# Altium PCB Solar_Charger3.PcbDoc
Units mm, origin at the board's own origin, x right, y up, seen from the top; angles counter-clockwise.
Board outline 79.76 x 43.81 mm, 2 copper layers (Top Layer, Bottom Layer); 24 components, 17 nets, 57 pads, 11 vias.
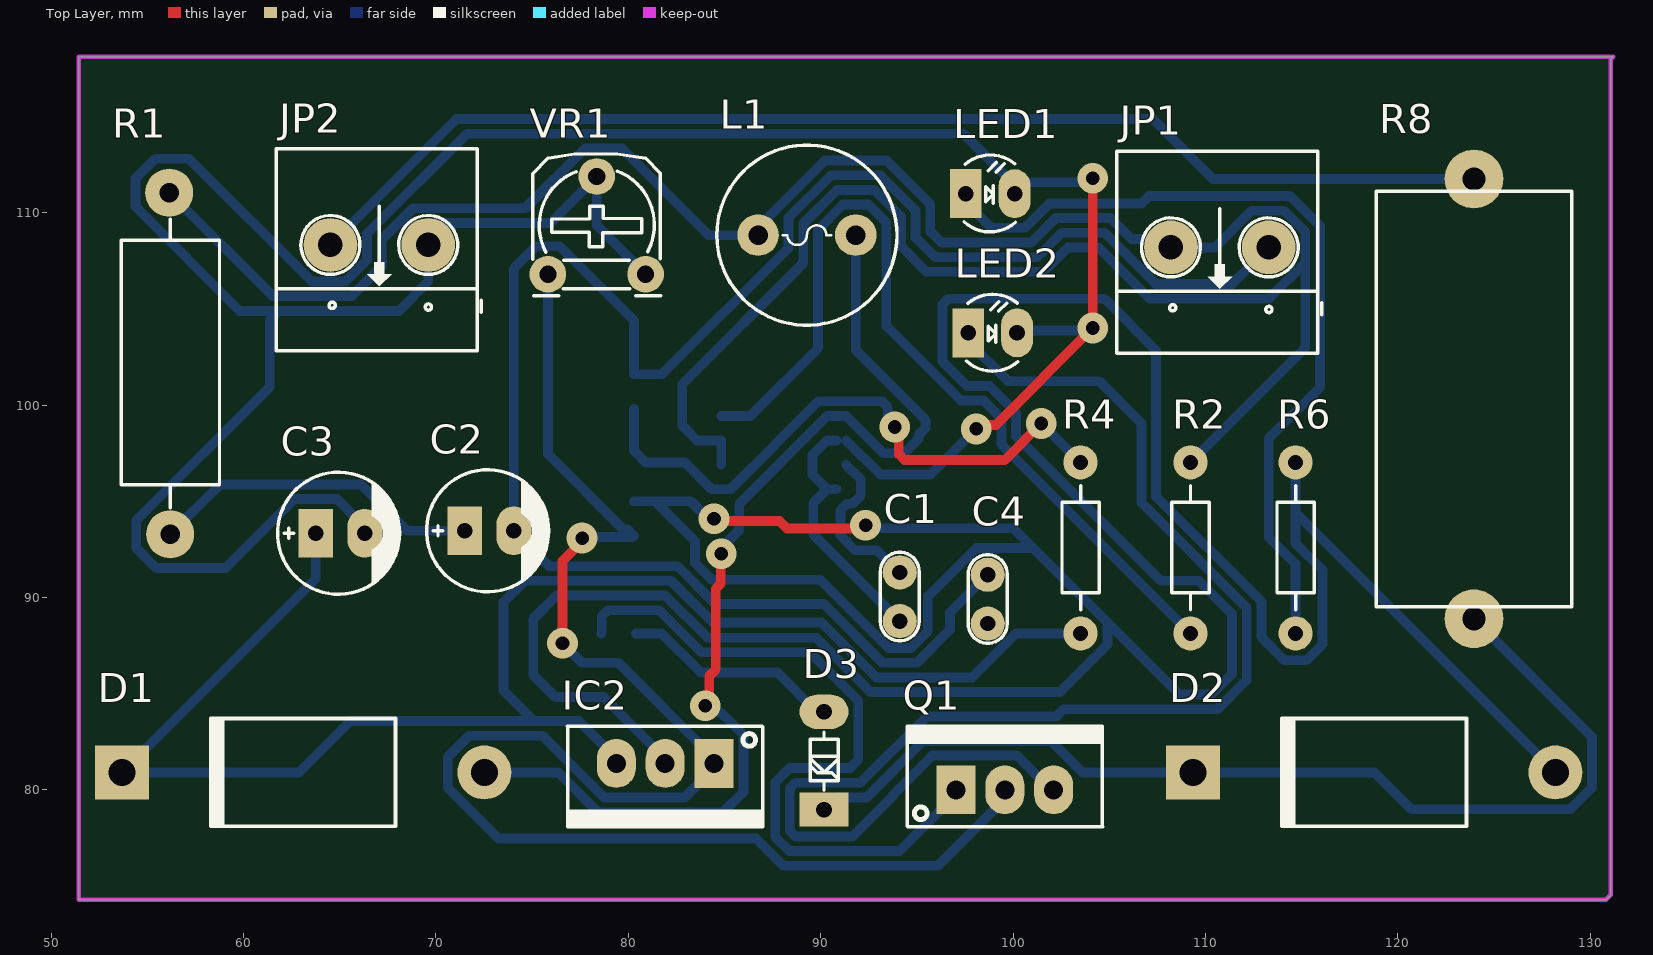
[diagram p0: Top Layer view]
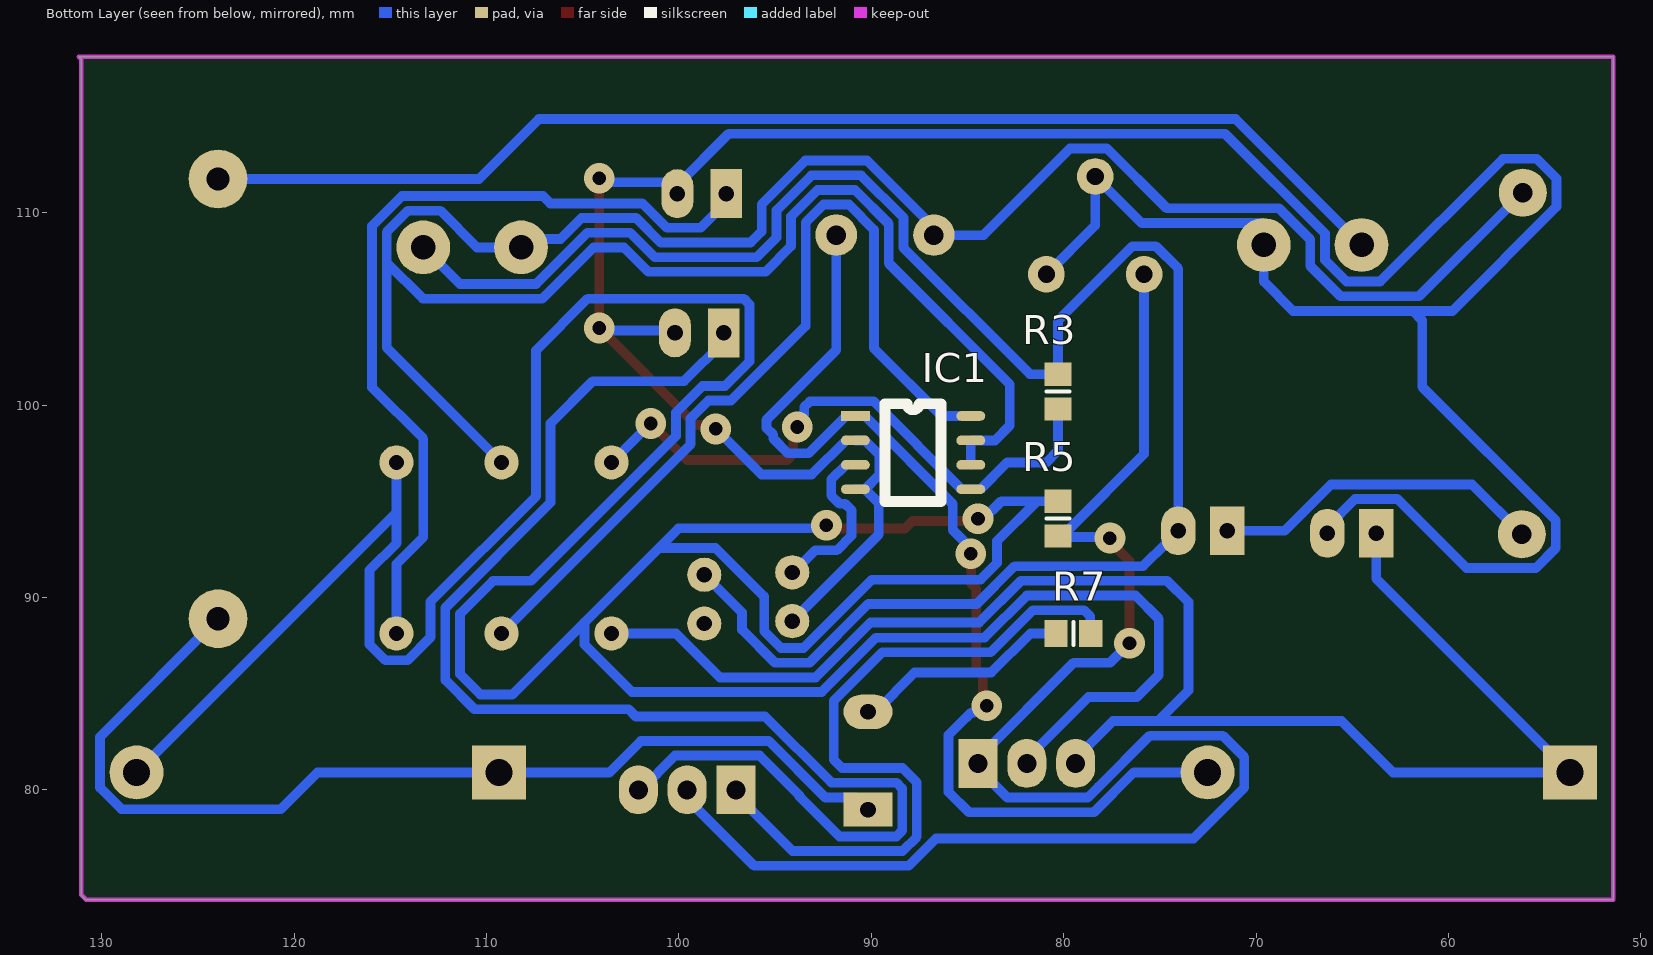
[diagram p1: Bottom Layer view, seen from below]
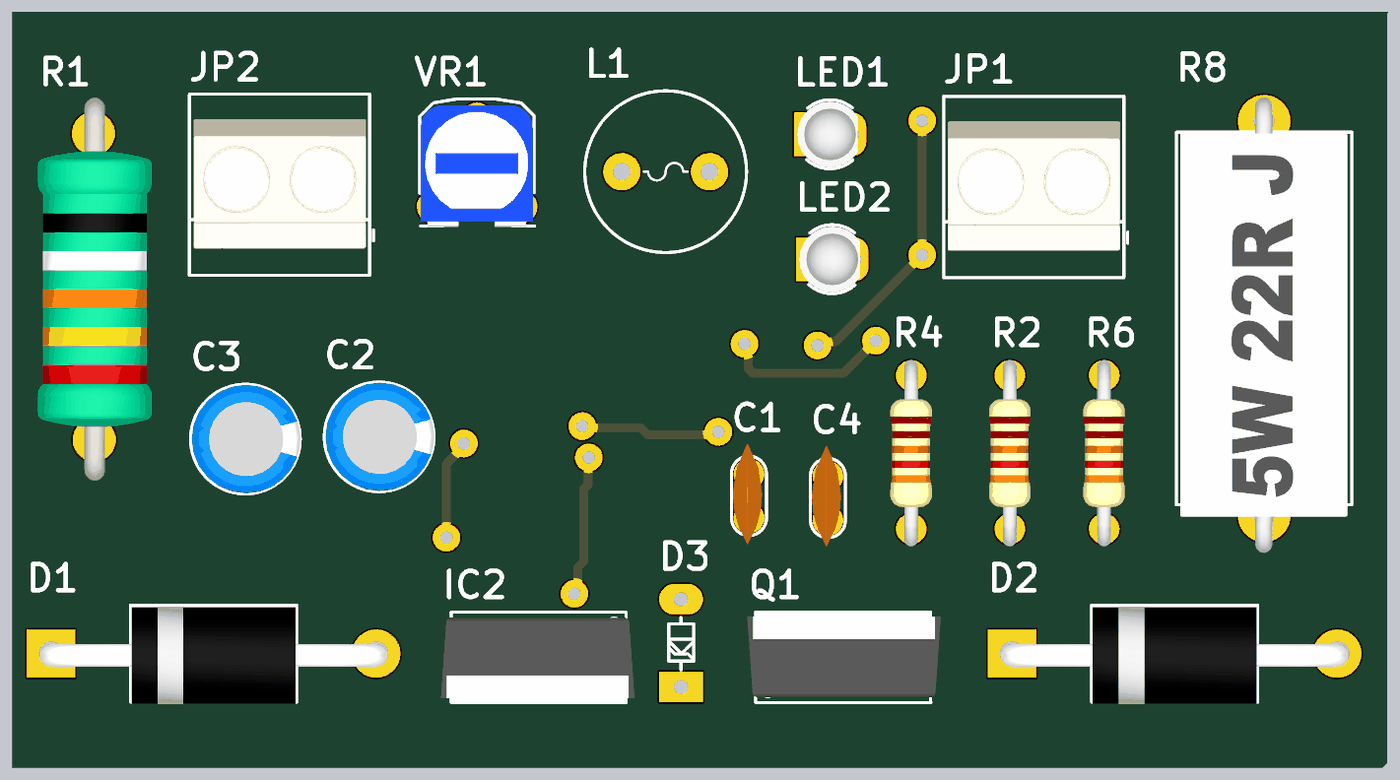
[diagram p2: 3D render of the assembled board from above, using the file's embedded part models]
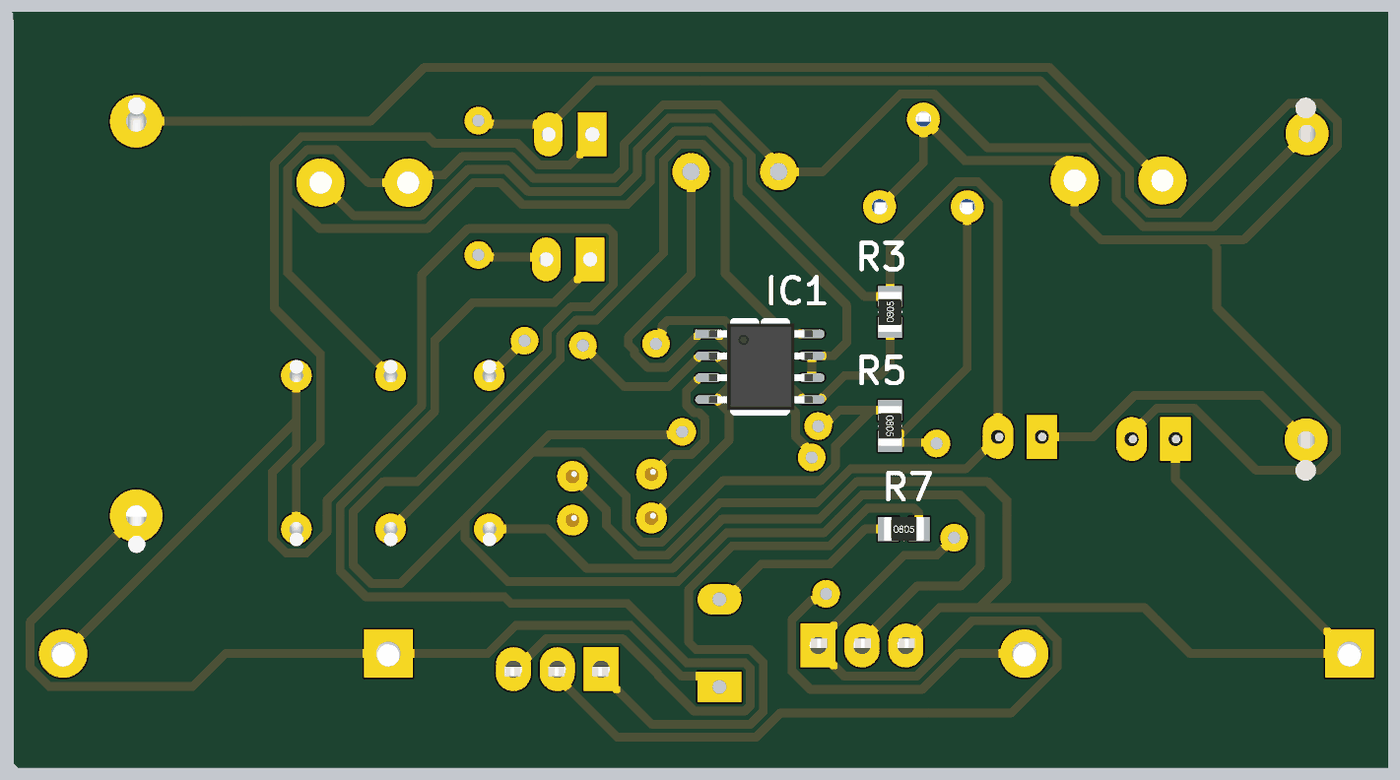
[diagram p3: 3D render of the assembled board from below, using the file's embedded part models]

## Layer stack, top to bottom
Top Solder: solder mask 0.0102, Solder Resist, Dk 3.5
Top Layer: signal copper 0.0356
Dielectric 1: dielectric 0.32, FR-4, Dk 4.8
Bottom Layer: signal copper 0.0356
Bottom Solder: solder mask 0.0102, Solder Resist, Dk 3.5

## Board outline
51.435,74.295 51.435,118.11 131.191,118.11 131.064,117.983 131.064,74.549 130.81,74.295

## Design rules (kind name [scope] priority, off if disabled: settings)
Clearance [All] p1: gap=0.254 ignorepadtopadclearanceinfootprint=FALSE except(0: Arc-Hole Track-Hole SMDPad-Hole THPad-Hole Via-Hole Fill-Hole Poly-Hole Region-Hole Text-Hole)
MinimumSolderMaskSliver [All] p1: minsoldermaskwidth=0
PolygonConnect [All] p1: connectstyle=Relief reliefconductorwidth=0.254 reliefentries=4 polygonreliefangle="90 Angle" airgapwidth=0.254
RoutingVias [All] p1: holewidth=0.711 width=1.27 viastyle="Through Hole" minholewidth=0.711 minwidth=1.27 maxholewidth=0.711 maxwidth=2
SilkToSolderMaskClearance [IsPad] p1: minsilkscreentomaskgap=0 clearancetoexposedcopper=TRUE
SolderMaskExpansion [All] p1: expansion=0.102 istentingtop=FALSE
Width [All] p1: maxlimit=0.762 minlimit=0.254 preferedwidth=0.508 minimp=50.000000 maximp=50.000000 favimp=50.000000
28 further rules are at their usual default settings.

## Components (designator, comment, footprint, x,y, rotation, side; value= is the part's Value field where it differs from the comment)
C1 "270pF" CN1 94.107,88.773 r90 top value=100pF
C2 "100uF" CP1/2.5 71.501,93.472 r0 top value="47uF/16 - 50V"
C3 "100uF" CP1/2.5 63.754,93.345 r0 top value="47uF/16 - 50V"
C4 "100 nF" CN1 98.679,88.646 r90 top value=100pF
D1 "1N5819" DO-201 72.517,80.912 r180 top
D2 "1N4007" DO-201 128.187,80.912 r180 top
D3 "6V/0.5W" DZ0.5A 90.17,84.061 r90 top value=3v3
IC1 "MC34063" SOP8 90.825,99.441 r180 bottom
IC2 "LM317" QTO-220 84.455,81.382 r180 top
JP1 "Header 2_1" HED2 113.284,108.204 r180 top value="Header 2"
JP2 "Header 2_1" HED2 69.596,108.331 r180 top value="Header 2"
L1 "330mH" L01 89.281,108.839 r0 top value="150 mH"
LED1 "LED" LED-3 97.536,110.998 r0 top value="LED 3 ly Single Colour"
LED2 "LED" LED-3 97.663,103.759 r0 top value="LED 3 ly Single Colour"
Q1 "BD139" QTO-220 97.028,80.01 r0 top
R1 "0.3 Ohm/2W" R2W 56.185,93.294 r90 top value="R2W - 47"
R2 "180 Ohm" R1/4W 109.22,88.138 r90 top value="R1/4W - 1K"
R3 "1k" 0805_Res 80.291,100.711 r90 bottom value="R1/4W - 1K"
R4 "4k" R1/4W 103.505,88.138 r90 top value="R1/4W - 1K"
R5 "1k" 0805_Res 80.291,94.107 r270 bottom value="R1/4W - 1K"
R6 "4k" R1/4W 114.681,88.138 r90 top value="R1/4W - 1K"
R7 "1k" 0805_Res 79.491,88.138 r180 bottom value="R1/4W - 1K"
R8 "R6W - 1k" R5W 123.952,88.9 r90 top value="R5W - 0,47R"
VR1 "1K" VR 75.819,106.807 r0 top value="VR 10K"

## Footprints (in the part's own frame and the unit in brackets; to place one, negate y for a bottom-side part, rotate by r counter-clockwise, add the part's x,y. Pads: shape width x height; smd on the part's side, far side on the other; paste and mask are expansions set on the pad)
0805_Res [mm] "Chip Resistor, Body 2.0x1.2mm, IPC Medium Density"
  rect 1.2x1.4 smd: 1(-0.9,0) 2(0.9,0)
  silkscreen extent 0,-0.6 0,0.6, body extent -1.15,-0.67 1.15,0.67, height 0.76
CN1 [mil]
  round 70 hole 31: 1(0,0) 2(100,0)
  silkscreen extent -40,-40 141,40, body extent -60,-30 170,37, height 265
CP1/2.5 [mil] "Tu hoa 33 >100 uF,50V, 220uF/16V,25V"
  rect 70x100 hole 32: 1(0,0)
  oval 70x100 hole 32: 2(100,0)
  silkscreen extent -78,-125 172,125, body extent -76,-124 172,124, height 422
DO-201 [mm] "Diode, Axial; Body 9.5 x 5.6 mm (LxDia. max), Lead Dia. 1.32 mm (max)"
  round 2.8 hole 1.4: 1(0,0)
  rect 2.8x2.8 hole 1.4: 2(18.84,0)
  silkscreen extent 4.62,-2.8 14.32,2.8, body extent -0.65,-2.72 19.49,2.92, height 5.82
DZ0.5A [mil] "Diode Zenner, W 80mil, L 300mil"
  oval 70x100 hole 32: 1(0,0)
  rect 70x100 hole 32: 2(-200,0)
  silkscreen extent -161,-29 -42,28
HED2 [mil] "Header 2, 2 pin, hight 300mil, Pin to Pin 200, Colour Green"
  round 110 hole 50: 1(0,0) 2(200,0)
  silkscreen extent -109,-197 311,217, body extent -92,-140 302,155, height 394
L01 [mil] "Inductor"
  round 85 hole 40: 1(-100,0) 2(100,0)
  silkscreen extent -184,-184 184,184
LED-3 [mil] "LED 2 PIN, 3ly Only colour"
  rect 65x100 hole 32: 1(0,0)
  oval 65x100 hole 32: 2(100,0)
  silkscreen extent -4,-78 102,79, body extent -25,-75 113,75, height 217
QTO-220 [mil] "TO-220 - 1-2-3"
  rect 80x100 hole 39: 1(0,0)
  oval 80x100 hole 39: 2(100,0) 3(200,0)
  silkscreen extent -100,-76 300,130, body extent -119,-64 322,121, height 755
R1/4W [mil] "R 1/4W, 2 Pin, 350mil"
  round 70 hole 31: 1(0,0) 2(350,0)
  silkscreen extent 48,-38 302,38, body extent -40,-47 386,47, height 111
R2W [mm] "R2W, 2 pin, 700mil"
  round 2.5 hole 1: 1(0,0) 2(17.755,0.051)
  silkscreen extent 1.37,-2.57 16.38,2.54, body extent -2.36,-3.33 19.84,3.27, height 8.3
R5W [mil] "R5W , 2 pin, 400 x 950mil"
  round 120 hole 47.24: 1(0,0) 2(900,0)
  silkscreen extent 25,-200 875,200, body extent -85,-190 955,192, height 363
SOP8 [mm]
  rect 1.5x0.5 smd: 1(0,0)
  oval 1.5x0.5 smd: 2(0,-1.27) 3(0,-2.54) 4(0,-3.81) 5(6,-3.81) 6(6,-2.54) 7(6,-1.27) 8(6,0)
  silkscreen extent 1.54,-4.45 4.46,0.63, body extent 0.03,-4.41 6.07,0.61, height 1.6
VR [mil] "Resistor Variable"
  round 75 hole 35: 1(0,0) 2(100,200) 3(200,0)
  silkscreen extent -31,-44 231,246, body extent -29,-46 227,232, height 295

## Part data
C1 C4: library part CN1, "Cap np  1pF - 472pF"
C2 C3: library part CP2, "C 47uF/50V , 220uF/16V", Description 1="470uF/6,3V - 330uF/10V - 220uF/16V", Description 2="100uF/25V - 35V - 47uF/50V - 22uF/100V", Description 3="33uF => 47uF/63V - 1uF => 4,7uF/160V", Description 4="1uF => 2,2uF/250V - 1uF/350V"
D3: library part DZ, "Diode Zenner"
IC1: library part SO8
IC2: "Adj Voltage +1.2 -> +37V"
JP1 JP2: "Header, 2-Pin", Manufacturer="Generic Components", Class=Connector
L1: library part L1, "Inductor"
LED1 LED2: "LED Single colour Green and Red"
R1: library part R2W, "Resistor 2W"
R2 R4 R6: library part R1/4W, "Resistor 1/4W"
R3 R5 R7: library part R, "Resistor 1/4W"
R8: library part R5W, "Resistor 5W"
VR1: library part VR1, "Var Resistor"

## Via types
v1: diameter 1.6, hole 0.711, Top Layer to Bottom Layer, 11 vias

## Nets (pads, with @x,y where several pads share a name; then routed paths per layer and width w, separated by ;. In a path a pad name is that pad's centre, name@x,y a point inside that pad or via, vN(x,y) a via of type N, cw(c..) or ccw(c..) an arc to the next point about the centre after c; other vN are vias at no path point)
GND: C1.1 C3.2 IC1.2 IC1.4 JP2.1 LED1.2 LED2.2 VR1.2 VR1.3 | length 170.4
  Top Layer w0.508: v1(98.081,98.769) 98.29,98.978 99.105,98.978 103.95,103.823 104.14,103.823 v1(104.14,111.798)
  Bottom Layer w0.508: C3.2 66.294,93.682 64.853,95.123 62.655,95.123 59.068,91.536 55.457,91.536 54.427,92.566 54.427,94.022 61.363,100.958 61.363,104.416 61.849,104.902 ; JP2.1@68.472,108.285 69.661,109.474 73.533,109.474 75.946,109.474 VR1.2 78.359,109.347 VR1.3 ; JP2.1 69.596,106.426 68.072,104.902 61.849,104.902 ; IC1.4@90.337,95.631 IC1.4 ; IC1.2 90.333,98.171 89.567,97.405 89.567,96.397 90.333,95.631 89.61,94.909 89.61,93.27 C1.1 ; IC1.2@91.321,98.167 93.095,96.393 95.705,96.393 v1(98.081,98.769) ; LED2.2@99.706,104.256 LED2.2 100.33,103.886 104.013,103.886 v1(104.14,104.013) ; v1(104.14,111.798) 103.931,111.589 100.604,111.589 100.076,111.061 LED1.2 100.076,111.442 97.409,114.109 71.603,114.109 66.421,108.928 66.421,107.542 65.305,106.426 63.546,106.426 57.165,112.807 55.406,112.807 54.376,111.777 54.376,110.32 59.794,104.902 61.849,104.902
NetC1_2: C1.2 IC1.3 | length 8.5
  Bottom Layer w0.508: IC1.3@91.321,96.897 92.083,96.135 92.083,95.317 91.639,94.873 91.352,94.873 91.024,94.545 91.024,93.222 91.791,92.456 92.915,92.456 94.058,91.313 C1.2
NetC2_1: C2.1 R1.1 | length 17.4
  Bottom Layer w0.508: R1.1 58.776,95.885 66.111,95.885 68.524,93.472 C2.1
NetC2_2: C2.2 C4.2 JP1.1 R3.2 | length 97.9
  Bottom Layer w0.508: C4.2 96.719,89.226 96.719,88.331 95.001,86.614 93.207,86.614 90.159,89.662 84.517,89.662 82.547,91.632 75.881,91.632 74.665,92.848 74.628,92.848 74.041,93.435 C2.2 74.041,107.094 75.214,108.267 76.424,108.267 80.291,104.4 R3.2 81.758,101.611 88.328,108.181 88.328,109.747 90.532,111.95 93.11,111.95 94.932,110.128 94.932,108.714 95.95,107.696 101.26,107.696 102.53,108.966 104.748,108.966 107.415,106.299 111.379,106.299 JP1.1
NetC3_1: C3.1 D1.2 IC2.3 R4.1 | length 84.8
  Bottom Layer w0.508: C3.1 63.754,90.989 D1.2 62.888,80.912 65.558,83.582 77.429,83.582 79.375,81.636 IC2.3 ; 75.107,83.582 73.512,85.176 73.512,89.768 74.614,90.87 82.231,90.87 84.391,88.71 90.034,88.71 92.891,85.852 97.861,85.852 100.147,88.138 R4.1
NetD1_1: D1.1 IC1.1 L1.2 | length 56.1
  Top Layer w0.508: v1(83.996,84.377) 84.205,84.586 84.205,85.93 84.545,86.271 84.545,90.462 84.799,90.716 84.799,92.249 v1(84.828,92.278)
  Bottom Layer w0.508: D1.1 76.358,80.912 78.428,78.842 84.919,78.842 85.979,79.901 85.979,82.862 85.392,83.449 84.827,84.015 84.653,84.015 84.291,84.377 v1(83.996,84.377) ; v1(84.828,92.278) 84.828,92.573 85.763,93.508 85.763,94.871 90.333,99.441 91.317,99.441 93.26,97.498 94.331,97.498 95.095,98.262 95.095,98.469 95.448,98.822 95.448,99.243 91.821,102.87 L1.2
NetD2_1: D2.1 IC2.2 R5.1 R6.2 | length 198.9
  Top Layer w0.508: v1(84.452,94.093) 84.565,93.98 87.863,93.98 88.251,93.592 92.16,93.592 v1(92.332,93.764)
  Bottom Layer w0.508: R5.1 81.396,95.007 ; IC2.2 81.915,81.636 80.066,83.484 78.715,84.835 76.2,84.835 75.057,85.978 75.057,88.9 76.265,90.108 81.915,90.108 84.107,87.916 89.749,87.916 92.576,85.09 102.433,85.09 104.902,87.559 104.902,88.717 ; v1(84.452,94.093) 84.156,94.093 83.242,95.007 81.396,95.007 ; v1(92.332,93.764) 92.497,93.599 100.02,93.599 101.036,92.583 ; R6.2 114.681,94.418 ; D2.1 114.681,94.418 ; 81.396,95.007 83.458,92.945 83.458,91.798 84.324,90.932 89.966,90.932 93.522,87.376 94.686,87.376 95.567,88.258 95.567,90.05 98.1,92.583 101.036,92.583 ; 101.036,92.583 104.902,88.717 ; 104.902,88.717 108.656,84.963 110.319,84.963 111.379,86.023 111.379,89.158 109.666,90.87 107.687,90.87 100.151,98.406 100.151,99.626 98.774,101.003 97.605,101.003 96.329,102.279 96.329,105.239 96.627,105.537 104.74,105.537 107.429,102.849 107.429,95.263 112.903,89.789 112.903,87.94 114.102,86.741 115.26,86.741 116.078,87.559 116.078,91.423 114.681,92.82 114.681,94.418
NetD2_2: D2.2 D3.2 R8.1 | length 54.7
  Bottom Layer w0.508: D3.2 90.805,79.616 92.392,79.616 95.326,82.55 101.977,82.55 103.616,80.912 D2.2 118.781,80.912 120.689,79.004 128.977,79.004 130.095,80.121 130.095,82.757 R8.1
NetD3_1: D3.1 R7.1 | length 11.5
  Bottom Layer w0.508: R7.1 81.73,88.138 83.768,86.1 87.751,86.1 89.789,84.061 D3.1
NetIC1_5: IC1.5 R3.1 R4.2 | length 32.1
  Top Layer w0.508: v1(93.849,98.865) 94.058,98.656 94.058,97.453 94.355,97.155 99.568,97.155 v1(101.459,99.046)
  Bottom Layer w0.508: R3.1 80.291,97.636 80.899,97.028 82.936,97.028 84.333,95.631 IC1.5 85.317,95.631 87.595,97.909 87.595,97.929 89.868,100.203 93.19,100.203 93.487,99.905 93.487,99.522 93.849,99.161 v1(93.849,98.865) ; v1(101.459,99.046) 101.473,99.046 103.491,97.028 R4.2
NetIC1_6: IC1.6 IC1.7 JP1.2 L1.1 R1.2 R2.2 | length 137
  Bottom Layer w0.508: R1.2 61.519,105.664 65.621,105.664 67.183,107.226 67.183,108.612 68.807,110.236 74.643,110.236 77.754,113.347 79.664,113.347 84.173,108.839 L1.1 86.741,109.237 90.217,112.712 93.425,112.712 95.694,110.443 95.694,109.029 96.266,108.458 100.944,108.458 102.214,109.728 105.064,109.728 106.15,108.641 107.767,108.641 JP1.2 110.495,108.204 112.4,110.109 114.073,110.109 115.189,108.993 115.189,107.415 ; IC1.6 IC1.7 83.566,98.171 82.804,98.933 82.804,101.092 89.09,107.379 89.09,109.431 90.848,111.188 92.794,111.188 94.17,109.812 94.17,108.267 95.504,106.934 101.575,106.934 102.845,108.204 104.432,108.204 107.099,105.537 113.311,105.537 115.189,107.415 ; R2.2 115.189,102.997 115.189,107.415
NetIC1_8: IC1.8 R2.1 | length 45.7
  Bottom Layer w0.508: IC1.8 86.337,99.441 89.852,102.957 89.852,109.116 91.163,110.426 92.479,110.426 93.408,109.497 93.408,104.122 97.289,100.241 98.459,100.241 99.389,99.311 99.389,97.969 R2.1
NetIC2_1: IC2.1 Q1.2 R5.2 VR1.1 | length 85.5
  Top Layer w0.508: v1(76.581,87.63) 76.581,91.898 77.597,92.914 v1(77.597,93.091)
  Bottom Layer w0.508: VR1.1 75.819,97.461 79.727,93.553 79.945,93.553 R5.2 80.233,93.149 77.655,93.149 v1(77.597,93.091) ; v1(76.581,87.63) 77.597,86.614 79.477,86.614 84.455,81.636 IC2.1 84.455,81.128 82.931,79.604 78.744,79.604 78.198,80.15 75.528,82.82 71.727,82.82 70.609,81.702 70.609,80.121 73.249,77.481 86.638,77.481 88.058,76.06 96.083,76.06 99.568,79.546 Q1.2
NetJP2_2: JP2.2 R8.2 | length 63.4
  Bottom Layer w0.508: JP2.2 71.056,114.871 107.279,114.871 110.39,111.76 R8.2
NetLED1_1: LED1.1 R6.1 | length 43.6
  Bottom Layer w0.508: LED1.1 97.536,110.553 98.87,109.22 100.628,109.22 101.898,110.49 106.683,110.49 107.064,110.871 114.389,110.871 115.951,109.309 115.951,100.927 113.284,98.26 113.284,93.14 114.681,91.743 R6.1
NetLED2_1: LED2.1 Q1.3 | length 71.5
  Bottom Layer w0.508: LED2.1 97.663,103.314 99.727,101.251 104.476,101.251 106.667,99.06 106.667,94.948 112.141,89.473 112.141,85.707 110.635,84.201 102.621,84.201 102.24,83.82 95.518,83.82 92.077,80.378 88.69,80.378 88.392,80.081 88.392,77.882 88.69,77.584 91.65,77.584 93.726,79.66 93.726,79.712 95.802,81.788 100.199,81.788 101.977,80.01 Q1.3
NetQ1_1: Q1.1 R7.2 | length 38.2
  Bottom Layer w0.508: R7.2 78.613,88.16 78.613,89.027 78.932,89.346 81.6,89.346 83.791,87.154 89.433,87.154 91.948,84.64 91.948,81.567 91.522,81.14 88.374,81.14 87.63,80.396 87.63,77.566 88.374,76.822 94.094,76.822 97.028,79.756 Q1.1
pads on no net: C4.1

## Keep-outs
Keep-Out Layer:
  the board outline again, w0.254